# EAGLE board CT_schematic (EAGLE 7.6.0)

Size 100 x 80 mm. Coordinates in mm from the lower left corner, seen from the top.
Outline: 0,0 100,0 100,80 0,80 0,0
Copper layers (1*16): Top 0.035mm / dielectric 1.5mm / Bottom 0.035mm
Design rules "default": minimum track width 10mil, minimum drill 24mil, track to track 8mil, track to pad 8mil, pad to pad 8mil, via to via 8mil, smd to smd 8mil, copper to edge 40mil, drill to drill 8mil, minimum pad ring 10mil, minimum via ring 8mil, stop-mask expansion 4mil, vias tented up to drill 0mil, thermal gap 10mil

## Footprints (pad centres in the part's own frame; a part is rotated, then mirrored left to right if it is on the bottom)
C0603 = smd 0.8 x 0.8: 1 -0.762,0; 2 0.762,0
C0402 = smd 0.5 x 0.5: 1 -0.508,0; 2 0.508,0
C0805 = smd 1.2 x 1.3: 1 -1.016,0; 2 1.016,0
C1210 = smd 1.2 x 2.5: 1 -1.524,0; 2 1.524,0
EXV-9H = smd 3.505 x 1.676: 1 -2.857,0; 2 2.857,0
L0603 = smd 0.8 x 0.8: 1 -0.762,0; 2 0.762,0
PJ-037B_PACKAGE = drill 3.7 square: 1 12,0 | drill 3.2 square: 2 6,0
R0603 = smd 0.8 x 0.8: 1 -0.762,0; 2 0.762,0
UFBGA100 = smd 0.28 x 0.28: A1 -2.75,2.75; A2 -2.25,2.75; A3 -1.75,2.75; A4 -1.25,2.75; A5 -0.75,2.75; A6 -0.25,2.75; A7 0.25,2.75; A8 0.75,2.75; A9 1.25,2.75; A10 1.75,2.75; A11 2.25,2.75; A12 2.75,2.75; B1 -2.75,2.25; B2 -2.25,2.25; B3 -1.75,2.25; B4 -1.25,2.25; B5 -0.75,2.25; B6 -0.25,2.25; B7 0.25,2.25; B8 0.75,2.25; B9 1.25,2.25; B10 1.75,2.25; B11 2.25,2.25; B12 2.75,2.25; C1 -2.75,1.75; C2 -2.25,1.75; C3 -1.75,1.75; C4 -1.25,1.75; C5 -0.75,1.75; C8 0.75,1.75; C9 1.25,1.75; C10 1.75,1.75; C11 2.25,1.75; C12 2.75,1.75; D1 -2.75,1.25; D2 -2.25,1.25; D3 -1.75,1.25; D10 1.75,1.25; D11 2.25,1.25; D12 2.75,1.25; E1 -2.75,0.75; E2 -2.25,0.75; E3 -1.75,0.75; E10 1.75,0.75; E11 2.25,0.75; E12 2.75,0.75; F1 -2.75,0.25; F2 -2.25,0.25; F11 2.25,0.25; F12 2.75,0.25; G1 -2.75,-0.25; G2 -2.25,-0.25; G11 2.25,-0.25; G12 2.75,-0.25; H1 -2.75,-0.75; H2 -2.25,-0.75; H3 -1.75,-0.75; H10 1.75,-0.75; H11 2.25,-0.75; H12 2.75,-0.75; J1 -2.75,-1.25; J2 -2.25,-1.25; J3 -1.75,-1.25; J10 1.75,-1.25; J11 2.25,-1.25; J12 2.75,-1.25; K1 -2.75,-1.75; K2 -2.25,-1.75; K3 -1.75,-1.75; K4 -1.25,-1.75; K5 -0.75,-1.75; K8 0.75,-1.75; K9 1.25,-1.75; K10 1.75,-1.75; K11 2.25,-1.75; K12 2.75,-1.75; L1 -2.75,-2.25; L2 -2.25,-2.25; L3 -1.75,-2.25; L4 -1.25,-2.25; L5 -0.75,-2.25; L6 -0.25,-2.25; L7 0.25,-2.25; L8 0.75,-2.25; L9 1.25,-2.25; L10 1.75,-2.25; L11 2.25,-2.25; L12 2.75,-2.25; M1 -2.75,-2.75; M2 -2.25,-2.75; M3 -1.75,-2.75; M4 -1.25,-2.75; M5 -0.75,-2.75; M6 -0.25,-2.75; M7 0.25,-2.75; M8 0.75,-2.75; M9 1.25,-2.75; M10 1.75,-2.75; M11 2.25,-2.75; M12 2.75,-2.75
SSOP-28 = smd 1.5 x 0.4: 1 -3.625,4.225; 2 -3.625,3.575; 3 -3.625,2.925; 4 -3.625,2.275; 5 -3.625,1.625; 6 -3.625,0.975; 7 -3.625,0.325; 8 -3.625,-0.325; 9 -3.625,-0.975; 10 -3.625,-1.625; 11 -3.625,-2.275; 12 -3.625,-2.925; 13 -3.625,-3.575; 14 -3.625,-4.225; 15 3.625,-4.225; 16 3.625,-3.575; 17 3.625,-2.925; 18 3.625,-2.275; 19 3.625,-1.625; 20 3.625,-0.975; 21 3.625,-0.325; 22 3.625,0.325; 23 3.625,0.975; 24 3.625,1.625; 25 3.625,2.275; 26 3.625,2.925; 27 3.625,3.575; 28 3.625,4.225
FCI_10118193-0001LF = smd 0.4 x 1.35: 1 -1.3,2.675; 2 -0.65,2.675; 3 0,2.675; 4 0.65,2.675; 5 1.3,2.675 | smd 1.6 x 1.4: 6 -3.2,2.45; 7 3.2,2.45 | smd 1.9 x 1.9: 8 -1.2,0; 9 1.2,0 | hole 0.5: -3.3,0; 3.3,0
QFN-32 = smd 0.6 x 0.3: 1 -2.3,1.75; 2 -2.3,1.25; 3 -2.3,0.75; 4 -2.3,0.25; 5 -2.3,-0.25; 6 -2.3,-0.75; 7 -2.3,-1.25; 8 -2.3,-1.75; 17 2.3,-1.75; 18 2.3,-1.25; 19 2.3,-0.75; 20 2.3,-0.25; 21 2.3,0.25; 22 2.3,0.75; 23 2.3,1.25; 24 2.3,1.75 | smd 0.3 x 0.6: 9 -1.75,-2.3; 10 -1.25,-2.3; 11 -0.75,-2.3; 12 -0.25,-2.3; 13 0.25,-2.3; 14 0.75,-2.3; 15 1.25,-2.3; 16 1.75,-2.3; 25 1.75,2.3; 26 1.25,2.3; 27 0.75,2.3; 28 0.25,2.3; 29 -0.25,2.3; 30 -0.75,2.3; 31 -1.25,2.3; 32 -1.75,2.3 | smd 3.2 x 3.2: EXP 0,0
SJ-43515TS-SMT-TR = smd 2.2 x 3: 1 0.6,-7.4; 4 3.4,-7.4 | smd 3 x 3: 2 12.8,-7.4; 5 17,-3 | smd 2 x 3: 3 5.3,0; 6 2.5,0 | drill 1.8: P$7 4.5,-3.69; P$8 11.54,-3.69
WM-64PC = drill 0.6 pad 1: 1 -1,0.95; 2 -1,-0.95
ASEK = smd 1.4 x 1: 1 -1.1,-0.8; 2 1.1,-0.8; 3 1.1,0.8; 4 -1.1,0.8
ASFL1 = smd 1.7 x 1.5: 1 -1.27,-1.1; 2 1.27,-1.1; 3 1.27,1.1; 4 -1.27,1.1
WSON-8 = smd 0.3 x 0.6: 1 -0.75,0; 2 0.05,0; 3 0.85,0; 4 1.65,0; 5 1.65,3.8; 6 0.85,3.8; 7 0.05,3.8; 8 -0.75,3.8 | smd 3 x 2.6: PAD 0.45,1.9
SON-6 = smd 0.55 x 0.3: 1 -0.355,0.5 | smd 0.52 x 0.3: 2 -0.37,0; 3 -0.37,-0.5; 4 0.37,-0.5; 5 0.37,0; 6 0.37,0.5
SW_4-1437565-2 = smd 1.4 x 2.1: 1 -2.23,4.55; 2 -2.23,-4.55; 3 2.23,4.55; 4 2.23,-4.55
LGM67K-G1J2-24-Z = smd 0.8 x 1.4: A -2,0; C 0,0
NC7SZ125M5X = smd 1.3 x 0.7: 1 -1.3,0.95; 2 -1.3,0; 3 -1.3,-0.95; 4 1.3,-0.95; 5 1.3,0.95

## Placement (x,y rotation side)
C1  1e-07  [C0603]  -53.34,71.12 0 top  (outside the outline)
C2  1e-07  [C0603]  -57.15,71.12 0 top  (outside the outline)
C3  1e-07  [C0603]  -60.96,71.12 0 top  (outside the outline)
C4  1e-07  [C0603]  -64.77,71.12 0 top  (outside the outline)
C5  1e-07  [C0603]  -68.58,71.12 0 top  (outside the outline)
C6  4.7e-06  [C0603]  -49.53,71.12 0 top  (outside the outline)
C7  1e-08  [C0603]  -72.39,71.12 0 top  (outside the outline)
C8  1e-06  [C0603]  -76.2,71.12 0 top  (outside the outline)
C9  1e-07  [C0603]  -80.01,71.12 0 top  (outside the outline)
C10  1e-07  [C0402]  -19.05,81.28 0 top  (outside the outline)
C11  4.7e-06  [C0805]  -63.5,63.5 0 top  (outside the outline)
C12  1e-07  [C0402]  -22.86,81.28 0 top  (outside the outline)
C13  1e-07  [C0402]  -26.67,81.28 0 top  (outside the outline)
C14  1e-06  [C0603]  -15.24,76.2 0 top  (outside the outline)
C15  1e-06  [C0603]  -19.05,76.2 0 top  (outside the outline)
C16  1e-06  [C0603]  -22.86,76.2 0 top  (outside the outline)
C17  1e-06  [C0603]  -26.67,76.2 0 top  (outside the outline)
C18  1e-06  [C0603]  -30.48,76.2 0 top  (outside the outline)
C19  1e-06  [C0603]  -34.29,76.2 0 top  (outside the outline)
C20  1e-06  [C0603]  -38.1,76.2 0 top  (outside the outline)
C21  1e-07  [C0402]  -30.48,81.28 0 top  (outside the outline)
C22  1e-07  [C0402]  -34.29,81.28 0 top  (outside the outline)
C23  1e-07  [C0402]  -38.1,81.28 0 top  (outside the outline)
C24  1e-07  [C0402]  -41.91,81.28 0 top  (outside the outline)
C25  1e-06  [C0603]  -41.91,76.2 0 top  (outside the outline)
C26  1e-08  [C0402]  -45.72,81.28 0 top  (outside the outline)
C27  1e-08  [C0402]  -49.53,81.28 0 top  (outside the outline)
C28  1e-08  [C0402]  -53.34,81.28 0 top  (outside the outline)
C29  1e-08  [C0402]  -57.15,81.28 0 top  (outside the outline)
C30  1e-08  [C0402]  -60.96,81.28 0 top  (outside the outline)
C31  1e-05  [C1210]  -39.37,63.5 0 top  (outside the outline)
C32  1e-05  [C0805]  -68.58,63.5 0 top  (outside the outline)
C33  1e-08  [C0402]  -64.77,81.28 0 top  (outside the outline)
C34  1e-05  [C1210]  -45.72,63.5 0 top  (outside the outline)
C35  1e-05  [C1210]  -52.07,63.5 0 top  (outside the outline)
C36  1e-07  [C0402]  -68.58,81.28 0 top  (outside the outline)
C37  0.0001  [EXV-9H]  -66.04,54.61 0 top  (outside the outline)
C38  0.0001  [EXV-9H]  -17.78,64.77 0 top  (outside the outline)
C39  1e-08  [C0402]  -72.39,81.28 0 top  (outside the outline)
F1  240.0  [L0603]  -45.72,76.2 0 top  (outside the outline)
J1  PJ-037B  [PJ-037B_PACKAGE]  -55.88,22.86 0 top  (outside the outline)
R2  1000.0  [R0603]  -49.53,76.2 0 top  (outside the outline)
R4  4700.0  [R0603]  -53.34,76.2 0 top  (outside the outline)
R5  10000.0  [R0603]  -25.4,71.12 0 top  (outside the outline)
R6  4700.0  [R0603]  -57.15,76.2 0 top  (outside the outline)
R7  10000.0  [R0603]  -30.48,71.12 0 top  (outside the outline)
R8  10000.0  [R0603]  -35.56,71.12 0 top  (outside the outline)
R9  1270.0  [R0603]  -60.96,76.2 0 top  (outside the outline)
R10  1270.0  [R0603]  -64.77,76.2 0 top  (outside the outline)
R11  100000.0  [R0603]  -73.66,62.23 0 top  (outside the outline)
R12  200.0  [R0603]  -68.58,76.2 0 top  (outside the outline)
R13  1000.0  [R0603]  -72.39,76.2 0 top  (outside the outline)
R14  100000.0  [R0603]  -78.74,62.23 0 top  (outside the outline)
R15  2231.0  [R0603]  -76.2,76.2 0 top  (outside the outline)
R16  1000.0  [R0603]  -80.01,76.2 0 top  (outside the outline)
R17  10000.0  [R0603]  -40.64,71.12 0 top  (outside the outline)
R18  10000.0  [R0603]  -45.72,71.12 0 top  (outside the outline)
R19  9100.0  [R0603]  -15.24,81.28 0 top  (outside the outline)
R20  680000.0  [R0603]  -15.24,71.12 0 top  (outside the outline)
R21  120000.0  [R0603]  -20.32,71.12 0 top  (outside the outline)
U1  STM32L072VZI6  [UFBGA100]  -24.13,35.56 0 top  (outside the outline)
U2  FT232RL-REEL  [SSOP-28]  -20.32,7.62 0 top  (outside the outline)
U3  10118193-0001LF  [FCI_10118193-0001LF]  -35.56,54.61 0 top  (outside the outline)
U4  SGTL5000XNAA3  [QFN-32]  -48.26,35.56 0 top  (outside the outline)
U5  SJ-43515TS-SMT-TR  [SJ-43515TS-SMT-TR]  -52.07,10.16 0 top  (outside the outline)
U6  SJ-43515TS-SMT-TR  [SJ-43515TS-SMT-TR]  -80.01,10.16 0 top  (outside the outline)
U7  SJ-43515TS-SMT-TR  [SJ-43515TS-SMT-TR]  -39.37,24.13 0 top  (outside the outline)
U8  WM-64PCT  [WM-64PC]  -34.29,35.56 0 top  (outside the outline)
U9  ASEK-32.768KHz-ECST  [ASEK]  -57.15,54.61 0 top  (outside the outline)
U10  ASFL1-12MHZ-NCS  [ASFL1]  -64.77,45.72 0 top  (outside the outline)
U11  ASFL-24.57MHZ-NCS  [ASFL1]  -48.26,45.72 0 top  (outside the outline)
U12  ASFL1-25MHZ-NCS  [ASFL1]  -26.67,55.88 0 top  (outside the outline)
U13  LP3878SDX-ADJ/NOPB  [WSON-8]  -69.85,33.02 0 top  (outside the outline)
U14  LP3878SDX-ADJ/NOPB  [WSON-8]  -30.48,44.45 0 top  (outside the outline)
U15  TPS3895ADRYR  [SON-6]  -74.93,80.01 0 top  (outside the outline)
U16  4-1437565-2  [SW_4-1437565-2]  -72.39,21.59 0 top  (outside the outline)
U17  Q65110A2395  [LGM67K-G1J2-24-Z]  -27.94,63.5 0 top  (outside the outline)
U18  nc7sz125m5x  [NC7SZ125M5X]  -57.15,62.23 0 top  (outside the outline)

## Library data of the parts
C1-C39 F1 J1 R2 R4-R21 U1-U18 = circuit_tree

## Nets
CLK_U1_D1: U1.D1 U9.3
CLK_U1_F1: U1.F1 U12.3
CLK_U2_27: U2.27 U10.3
CLK_U4_21: U4.21 U11.3
GND: C1.2 C2.2 C3.2 C4.2 C5.2 C6.2 C7.2 C8.2 C9.2 C10.2 C11.2 C12.2 C13.2 C21.2 C22.2 C23.2 C24.2 C25.2 C26.2 C27.2 C28.2 C29.2 C30.2 C31.2 C32.2 C33.2 C34.2 C35.2 C36.2 C37.2 C38.2 C39.2 J1.2 R2.2 R5.2 R8.2 R10.2 R13.2 R16.2 R19.2 R21.2 U1.D3 U1.E3 U1.F11 U1.F12 U1.J1 U1.K1 U2.7 U2.18 U2.21 U2.25 U2.26 U3.5 U3.6 U3.7 U3.8 U3.9 U4.1 U4.3 U4.7 U4.EXP U6.1 U7.1 U8.2 U9.2 U10.2 U11.2 U12.2 U13.3 U13.PAD U14.3 U14.PAD U15.2 U17.C U18.1 U18.3
NET_U1_A4: R5.1 U1.A4
NET_U1_H2: R4.1 U1.H2 U18.4
NET_U1_M1: C7.1 C8.1 F1.1 U1.L1 U1.M1
NET_U1_M11: U17.A
NET_U1_M12: U16.3 U16.4
NET_U2_14: R7.1 U2.14
NET_U2_17: C12.1 U2.17
NET_U2_19: R8.1 U2.19
NET_U3_1: R6.1 U3.1
NET_U3_2: U2.16 U3.2
NET_U3_3: U2.15 U3.3
NET_U3_19: R6.2
NET_U4_10: C24.1 U4.10
NET_U4_29: R9.1 U4.29
NET_U4_31: R10.1 U4.31
NET_U5_1: U4.4 U5.1
NET_U5_2: U4.2 U5.2
NET_U5_5: U4.6 U5.5
NET_U6_2: C15.1 U6.2
NET_U6_5: C14.1 U6.5
NET_U6_11: C15.2
NET_U6_12: C14.2
NET_U7_2: C17.1 C18.1 U7.2
NET_U7_5: C16.1 U7.5
NET_U7_13: C17.2 C18.2
NET_U7_14: C16.2
NET_U8_1: C19.1 C20.1 C25.1 U4.16 U8.1
NET_U8_15: C19.2 C20.2
NET_U13_1: C30.1 U13.1
NET_U13_6: R12.2 R13.1 U13.6
NET_U13_8: R11.1 U13.8
NET_U14_1: C33.1 U14.1
NET_U14_6: R15.2 R16.1 U14.6
NET_U14_8: R14.1 U14.8
NET_U15_1: R18.1 R19.1 U15.1
NET_U15_3: R20.2 R21.1 U15.3
NET_U15_4: R17.1 U15.4 U18.2
NET_U16_1: R2.1 U16.1 U16.2
PROC_I2S2_CK: U1.B9 U4.24
PROC_I2S2_SD: U1.B7 U4.26
PROC_I2S2_WS: U1.B3 U4.23
PROC_LPUART1_CTS: U1.J11 U2.3
PROC_LPUART1_RTS: U1.C8 U2.11
PROC_LPUART1_RX: U1.A11 U2.1
PROC_LPUART1_TX: U1.A10 U2.5
VCC_S1_11V7: C31.1 C34.1 C37.1 C38.1 J1.1 R11.2 R14.2 U13.4 U14.4
VCC_TIER1_1V2: C21.1 C32.1 R12.1 U4.30 U13.5
VCC_TIER1_3V3: C1.1 C2.1 C3.1 C4.1 C5.1 C6.1 C9.1 C10.1 C11.1 C13.1 C22.1 C23.1 C26.1 C27.1 C28.1 C29.1 C35.1 C36.1 C39.1 F1.2 R4.2 R7.2 R9.2 R15.1 R17.2 R18.2 R20.1 U1.C4 U1.C11 U1.E2 U1.G11 U1.G12 U1.H3 U2.4 U2.20 U4.5 U4.20 U9.4 U10.4 U11.4 U12.4 U14.5 U15.6 U18.5

## Tracks (layer width: path | path; a pad name or v marks a point on that pad's centre or on a via)
CLK_U1_D1  (1 unrouted)
CLK_U1_F1  (1 unrouted)
CLK_U2_27  (1 unrouted)
CLK_U4_21  (1 unrouted)
GND  (75 unrouted)
NET_U1_A4  (1 unrouted)
NET_U1_H2  (2 unrouted)
NET_U1_M1  (4 unrouted)
NET_U1_M12  (1 unrouted)
NET_U2_14  (1 unrouted)
NET_U2_17  (1 unrouted)
NET_U2_19  (1 unrouted)
NET_U3_1  (1 unrouted)
NET_U3_2  (1 unrouted)
NET_U3_3  (1 unrouted)
NET_U4_10  (1 unrouted)
NET_U4_29  (1 unrouted)
NET_U4_31  (1 unrouted)
NET_U5_1  (1 unrouted)
NET_U5_2  (1 unrouted)
NET_U5_5  (1 unrouted)
NET_U6_2  (1 unrouted)
NET_U6_5  (1 unrouted)
NET_U7_2  (2 unrouted)
NET_U7_5  (1 unrouted)
NET_U7_13  (1 unrouted)
NET_U8_1  (4 unrouted)
NET_U8_15  (1 unrouted)
NET_U13_1  (1 unrouted)
NET_U13_6  (2 unrouted)
NET_U13_8  (1 unrouted)
NET_U14_1  (1 unrouted)
NET_U14_6  (2 unrouted)
NET_U14_8  (1 unrouted)
NET_U15_1  (2 unrouted)
NET_U15_3  (2 unrouted)
NET_U15_4  (2 unrouted)
NET_U16_1  (2 unrouted)
PROC_I2S2_CK  (1 unrouted)
PROC_I2S2_SD  (1 unrouted)
PROC_I2S2_WS  (1 unrouted)
PROC_LPUART1_CTS  (1 unrouted)
PROC_LPUART1_RTS  (1 unrouted)
PROC_LPUART1_RX  (1 unrouted)
PROC_LPUART1_TX  (1 unrouted)
VCC_S1_11V7  (8 unrouted)
VCC_TIER1_1V2  (4 unrouted)
VCC_TIER1_3V3  (43 unrouted)